# EAGLE board blmc_konze (EAGLE 4.15)
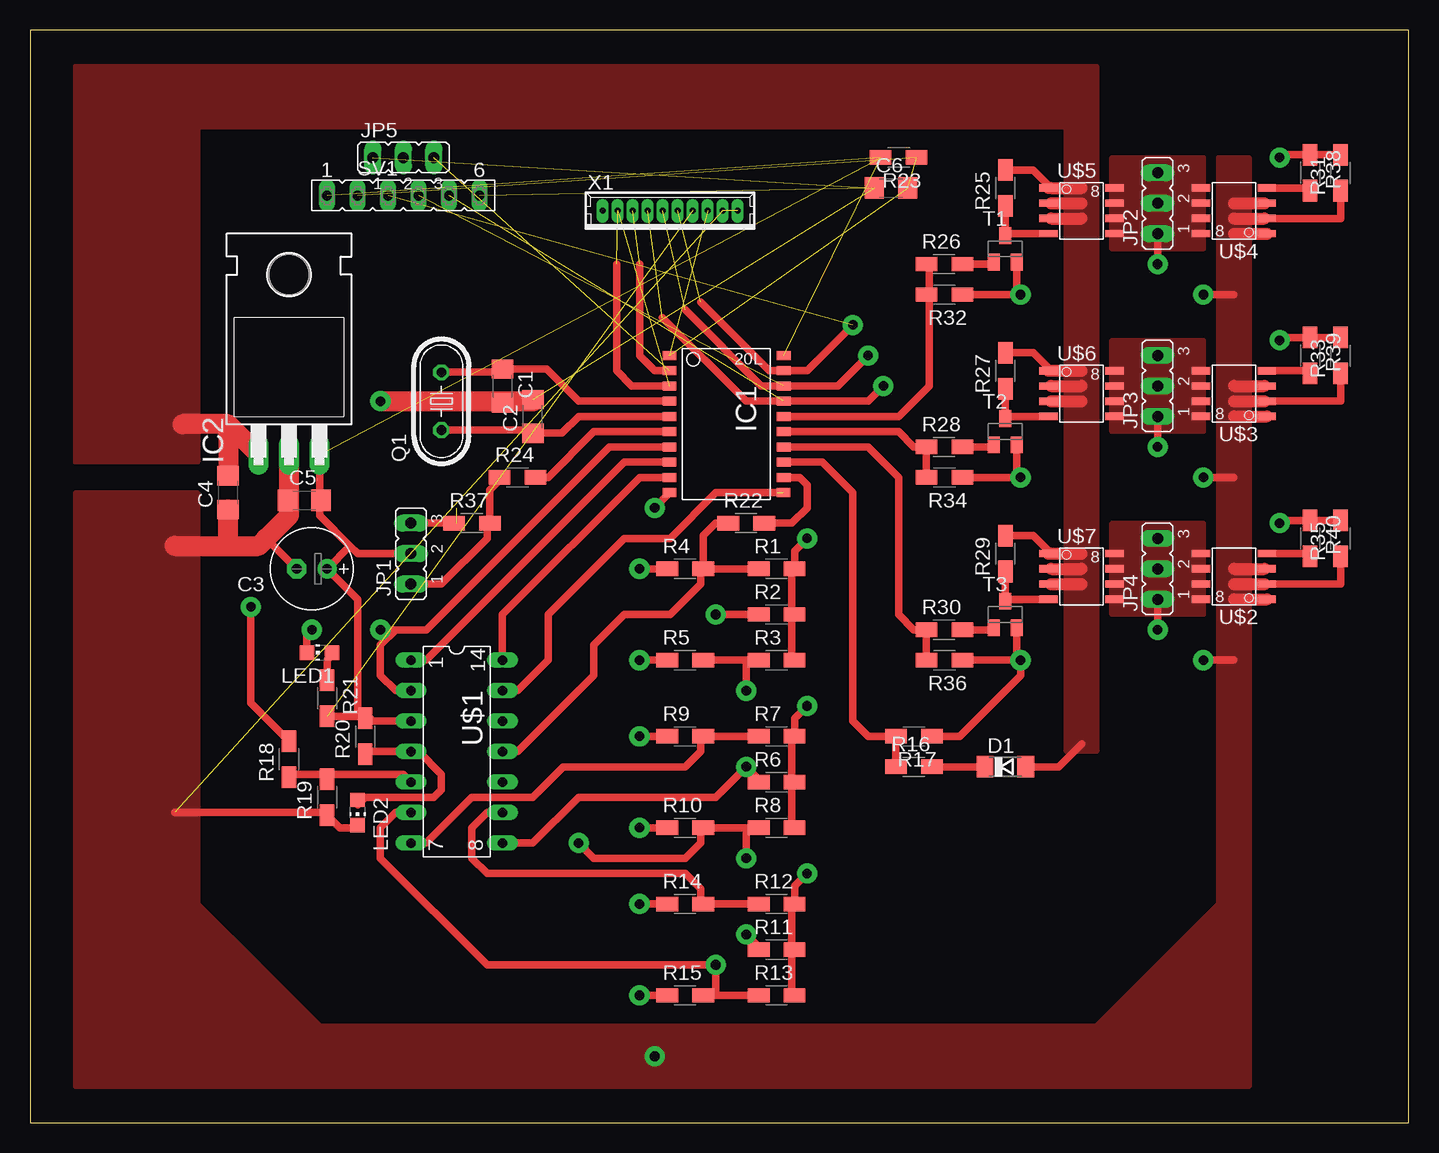
[diagram p0: board, top side]
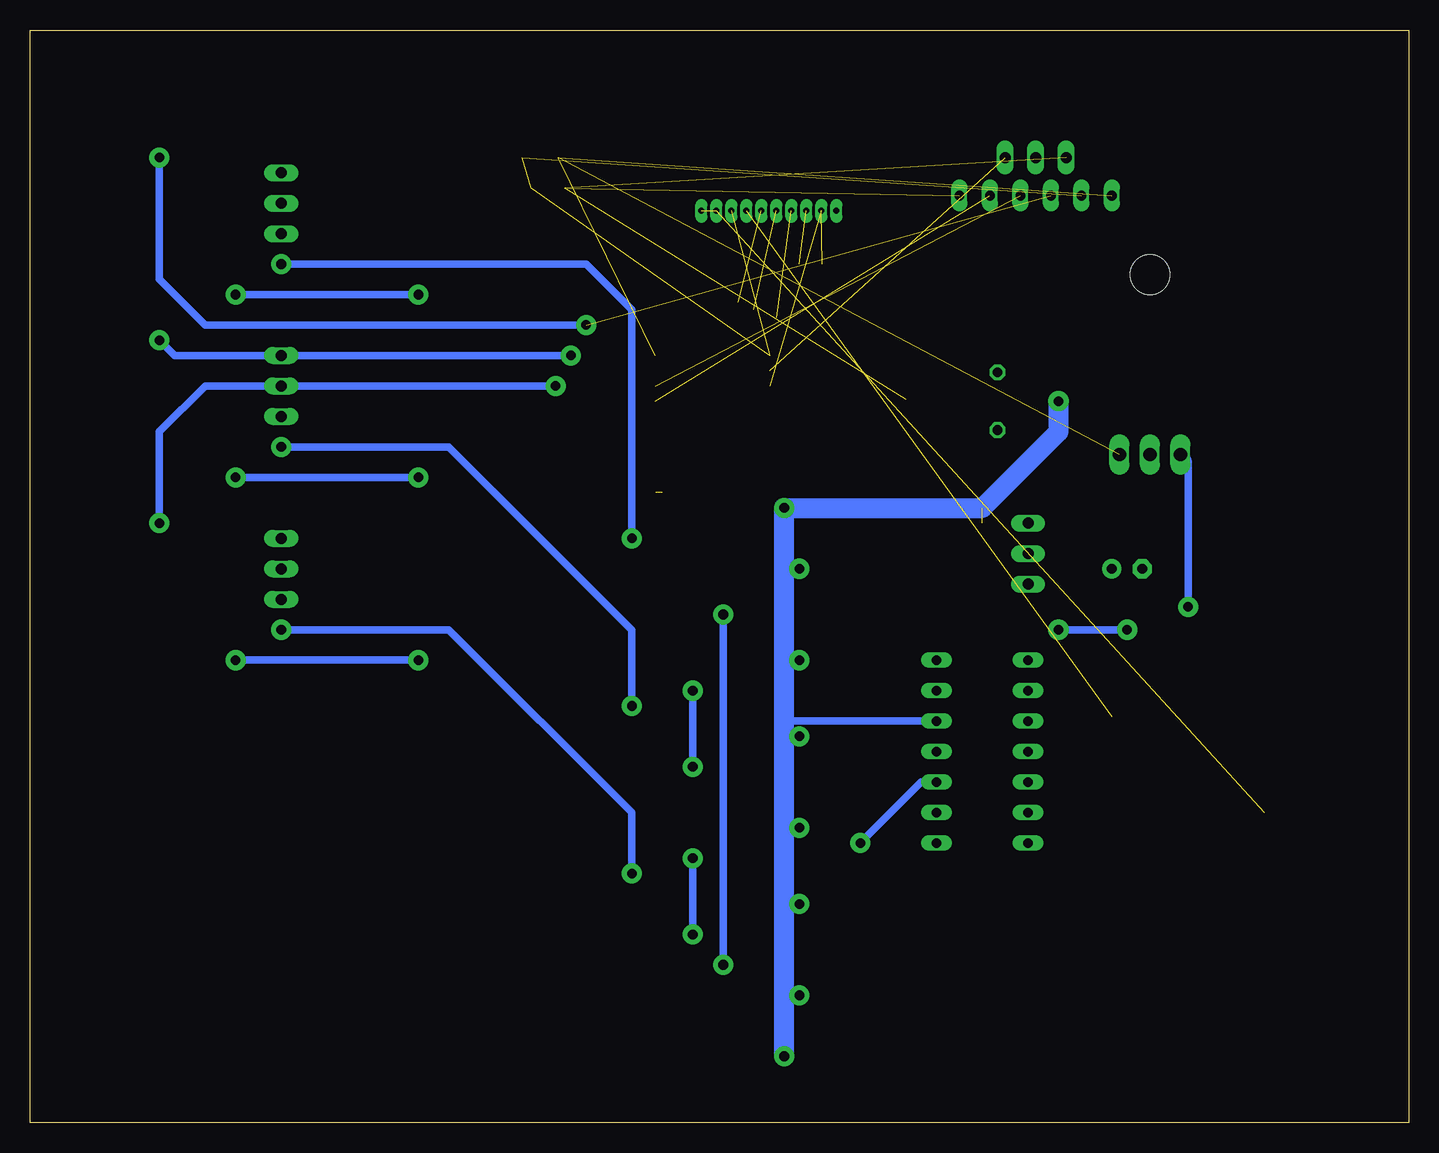
[diagram p1: board, bottom side, seen from below]

Size 114.92 x 91.11 mm. Coordinates in mm from the lower left corner, seen from the top.
Outline: 0,0 114.92,0 114.92,91.11 0,91.11 0,0
Copper layers (1*16): Top 0.035mm / dielectric 1.5mm / Bottom 0.035mm
Design rules "default": minimum track width 10mil, minimum drill 24mil, track to track 8mil, track to pad 8mil, pad to pad 8mil, via to via 8mil, smd to smd 8mil, copper to edge 40mil, drill to drill 8mil, minimum pad ring 10mil, minimum via ring 8mil, stop-mask expansion 4mil, vias tented up to drill 0mil, thermal gap 10mil

## Footprints (pad centres in the part's own frame; a part is rotated, then mirrored left to right if it is on the bottom)
C1206 = smd 1.6 x 1.8: 1 -1.4,0; 2 1.4,0
E2,5-7 = drill 0.813 pad 1.6 round: + -1.27,0 | drill 0.813 pad 1.6 octagon: - 1.27,0
SOD80C = smd 1.4 x 1.8: A 1.7,0; C -1.7,0
SO-20L = smd 0.762 x 1.143: 1 -5.08,-5.131; 2 -3.81,-5.131; 3 -2.54,-5.131; 4 -1.27,-5.131; 5 0,-5.131; 6 1.27,-5.131; 7 2.54,-5.131; 8 3.81,-5.131; 9 5.08,-5.131; 10 6.35,-5.131; 11 6.35,4.369; 12 5.08,4.394; 13 3.81,4.394; 14 2.54,4.394; 15 1.27,4.394; 16 0,4.394; 17 -1.27,4.394; 18 -2.54,4.394; 19 -3.81,4.394; 20 -5.08,4.394
TO220H = drill 1.118 long: 1 -2.54,-10.16; 2 0,-10.16; 3 2.54,-10.16 | hole 3.302: 0,4.826
JP2 = drill 0.914 long: 1 -2.54,0; 2 0,0; 3 2.54,0
CHIP-LED0805 = smd 1.2 x 1.2: A 0,-1.05; C 0,1.05
HC49U-V = drill 0.813 octagon: 1 -2.413,0; 2 2.413,0
R1206W = smd 1.8 x 1.2: 1 -1.499,0; 2 1.499,0
FE06 = drill 0.813 long: 1 -6.35,0; 2 -3.81,0; 3 -1.27,0; 4 1.27,0; 5 3.81,0; 6 6.35,0
SOT23 = smd 1 x 1.4: 1 -0.95,-1.1; 2 0.95,-1.1; 3 0,1.1
DIL-14 = drill 0.8 long: 1 -3.81,-3.81; 2 -1.27,-3.81; 3 1.27,-3.81; 4 3.81,-3.81; 5 6.35,-3.81; 6 8.89,-3.81; 7 11.43,-3.81; 8 11.43,3.81; 9 8.89,3.81; 10 6.35,3.81; 11 3.81,3.81; 12 1.27,3.81; 13 -1.27,3.81; 14 -3.81,3.81
SO-8 = smd 1.524 x 0.61: 1 -2.743,1.27; 2 -2.743,0; 3 -2.743,-1.27; 4 -2.743,-2.54; 5 2.743,-2.54; 6 2.743,-1.27; 7 2.743,0; 8 2.743,1.27
53047-10 = drill 0.5 pad 0.698 long: 1 5.625,0; 2 4.375,0; 3 3.125,0; 4 1.875,0; 5 0.625,0; 6 -0.625,0; 7 -1.875,0; 8 -3.125,0; 9 -4.375,0; 10 -5.625,0

## Placement (x,y rotation side)
C1  15pF  [C1206]  39.37,61.43 270 top
C2  15pF  [C1206]  41.9,58.89 90 top
C3  10µF  [E2,5-7]  23.49,46.19 180 top
C4  100nF  [C1206]  16.51,52.54 90 top
C5  100nF  [C1206]  22.85,51.91 0 top
C6  100nF  [C1206]  71.75,77.94 0 top
D1  [SOD80C]  81.28,29.68 0 top
IC1  AT90S2313S  [SO-20L]  58.41,58.89 270 top
IC2  7805T  [TO220H]  21.59,65.88 0 top
JP1  [JP2]  31.74,47.46 90 top
JP2  [JP2]  93.97,76.67 90 top
JP3  [JP2]  93.97,61.43 90 top
JP4  [JP2]  93.97,46.19 90 top
JP5  [JP2]  31.11,80.48 0 top
LED1  [CHIP-LED0805]  24.13,39.2 90 top
LED2  [CHIP-LED0805]  27.3,25.87 180 top
Q1  [HC49U-V]  34.29,60.16 90 top
R1  10k  [R1206W]  62.23,46.19 0 top
R2  20k  [R1206W]  62.23,42.38 0 top
R3  20k  [R1206W]  62.23,38.57 0 top
R4  2k2  [R1206W]  54.6,46.19 0 top
R5  2k2  [R1206W]  54.6,38.57 0 top
R6  20k  [R1206W]  62.23,28.41 0 top
R7  10k  [R1206W]  62.23,32.22 0 top
R8  20k  [R1206W]  62.23,24.6 0 top
R9  2k2  [R1206W]  54.6,32.22 0 top
R10  2k2  [R1206W]  54.6,24.6 0 top
R11  20k  [R1206W]  62.23,14.44 0 top
R12  10k  [R1206W]  62.23,18.25 0 top
R13  20k  [R1206W]  62.23,10.63 0 top
R14  2k2  [R1206W]  54.6,18.25 0 top
R15  2k2  [R1206W]  54.6,10.63 0 top
R16  20k  [R1206W]  73.66,29.68 0 top
R17  2k2  [R1206W]  73.66,32.22 180 top
R18  20k  [R1206W]  21.59,30.31 90 top
R19  10k  [R1206W]  24.76,27.14 90 top
R20  2k2  [R1206W]  27.93,32.22 90 top
R21  2k2  [R1206W]  24.76,35.39 270 top
R22  10k  [R1206W]  59.68,50 0 top
R23  10k  [R1206W]  72.38,80.48 180 top
R24  10k  [R1206W]  40.63,53.81 0 top
R25  680R  [R1206W]  81.28,77.94 90 top
R26  10k  [R1206W]  76.19,71.59 0 top
R27  680R  [R1206W]  81.28,62.7 90 top
R28  10k  [R1206W]  76.19,56.35 0 top
R29  680R  [R1206W]  81.28,47.46 90 top
R30  10k  [R1206W]  76.19,41.11 0 top
R31  47k  [R1206W]  109.22,79.21 90 top
R32  47k  [R1206W]  76.19,69.05 180 top
R33  47k  [R1206W]  109.22,63.97 90 top
R34  47k  [R1206W]  76.19,53.81 180 top
R35  47k  [R1206W]  109.22,48.73 90 top
R36  47k  [R1206W]  76.19,38.57 180 top
R37  47k  [R1206W]  36.82,50 0 top
R38  100R  [R1206W]  106.68,79.21 270 top
R39  100R  [R1206W]  106.68,63.97 270 top
R40  100R  [R1206W]  106.68,48.73 270 top
SV1  [FE06]  31.11,77.3 0 top
T1  BC847  [SOT23]  81.28,72.86 0 top
T2  BC847  [SOT23]  81.28,57.62 0 top
T3  BC847  [SOT23]  81.28,42.38 0 top
U$1  LM339D  [DIL-14]  35.55,34.76 270 top
U$2  SI4420N  [SO-8]  100.33,44.92 180 top
U$3  SI4420N  [SO-8]  100.33,60.16 180 top
U$4  SI4420N  [SO-8]  100.33,75.4 180 top
U$5  SI4425P  [SO-8]  87.62,76.67 0 top
U$6  SI4425P  [SO-8]  87.62,61.43 0 top
U$7  SI4425P  [SO-8]  87.62,46.19 0 top
X1  [53047-10]  53.34,76.03 0 top

## Library data of the parts
C1-C6 R1-R40 = rcl
D1 = diode
IC1 = atmel
IC2 = linear
JP1-JP5 = jumper
LED1 LED2 = led
Q1 = crystal
SV1 = con-lsta
T1-T3 = transistor-npn
U$1-U$7 = bko
X1 = con-molex

## Nets
+5V: C3.+ C5.2 IC1.20 IC2.3 JP1.2 R20.2 R21.2 R23.2 SV1.1 U$1.3 X1.4
+UB: C4.2 D1.A IC2.1 R18.2 R25.2 R27.2 R29.2 U$5.1 U$6.1 U$7.1
GND: C1.2 C2.2 C3.- C4.1 C5.1 C6.1 IC1.10 IC2.2 JP1.3 JP5.1 LED2.C R4.1 R5.1 R9.1 R10.1 R14.1 R15.1 R17.1 R19.1 R31.1 R32.1 R33.1 R34.1 R35.1 R36.1 R37.1 SV1.6 T1.2 T2.2 T3.2 U$1.12 U$2.1 U$3.1 U$4.1 X1.1 X1.2
MISO: IC1.18 R33.2 R39.1 SV1.4 X1.6
MOSI: IC1.17 R35.2 R40.1 SV1.5 X1.7
N$1: JP2.1 JP2.2 JP2.3 R1.2 R2.2 R3.2 U$4.5 U$4.6 U$4.7 U$4.8 U$5.5 U$5.6 U$5.7 U$5.8
N$2: R2.1 R13.1 R15.2 U$1.6
N$3: R1.1 R4.2 R22.1 U$1.11
N$4: JP3.1 JP3.2 JP3.3 R6.2 R7.2 R8.2 U$3.5 U$3.6 U$3.7 U$3.8 U$6.5 U$6.6 U$6.7 U$6.8
N$5: R38.2 U$4.4
N$7: IC1.16 R26.1 R32.2
N$8: R39.2 U$3.4
N$9: R40.2 U$2.4
N$10: R3.1 R5.2 R6.1 U$1.8
N$11: IC1.15 R28.1 R34.2
N$12: R7.1 R9.2 U$1.7
N$13: R8.1 R10.2 R11.1 U$1.10
N$14: IC1.14 R30.1 R36.2
N$15: R12.1 R14.2 U$1.9
N$16: IC1.8 U$1.1
N$17: IC1.7 LED1.C U$1.2
N$18: IC1.9 U$1.14
N$19: IC1.11 U$1.13
N$21: LED1.A R21.1
N$22: JP1.1 R24.1 R37.2
N$23: R18.1 R19.2 U$1.5
N$24: R27.1 T2.3 U$6.4
N$25: LED2.A R20.1 U$1.4
N$26: IC1.6 R24.2
N$27: C2.1 IC1.5 Q1.1
N$28: C1.1 IC1.4 Q1.2
N$29: D1.C R16.2
N$30: IC1.13 R16.1 R17.2
N$33: IC1.12 R22.2
N$34: R25.1 T1.3 U$5.4
N$39: R29.1 T3.3 U$7.4
N$43: JP4.1 JP4.2 JP4.3 R11.2 R12.2 R13.2 U$2.5 U$2.6 U$2.7 U$2.8 U$7.5 U$7.6 U$7.7 U$7.8
N$46: R30.2 T3.1
N$47: R28.2 T2.1
N$48: R26.2 T1.1
N$51: X1.10
RESET: C6.2 IC1.1 R23.1 SV1.2 X1.3
RXD: IC1.2 JP5.3 X1.8
SCK: IC1.19 R31.2 R38.1 SV1.3 X1.5
TXD: IC1.3 JP5.2 X1.9

## Tracks (layer width: path | path; a pad name or v marks a point on that pad's centre or on a via)
+5V  (4 unrouted)
  Top 0.61: 24.13,51.27 24.13,50.63 26.66,48.09 | 24.13,51.27 IC2.3 | 26.66,48.09 27.3,47.46 JP1.2 | C5.2 24.13,51.77 24.13,51.27 | 26.66,48.09 C3.+ 27.3,43.65 27.3,34.35 R20.2 | R20.2 27.93,34.12 28.57,33.49 U$1.3 | R20.2 27.93,33.49 27.53,33.9 R21.2
+UB  (via drill 0.8 pad 1.68)
  Top 0.61: R25.2 83.59,79.44 85.09,77.94 | U$6.1 85.09,62.7 83.59,64.2 R27.2 | R29.2 83.59,48.96 85.09,47.46 | D1.A 85.72,29.68 87.62,31.59 | R18.2 18.41,34.99 v18.41,43.02
  Top 1.016: U$5.1 85.09,77.94 87.62,77.94 | 85.09,76.67 87.62,76.67 | 85.09,75.4 87.62,75.4 | U$6.1 87.62,62.7 | 85.09,61.43 87.62,61.43 | 85.09,60.16 87.62,60.16 | U$7.1 85.09,47.46 87.62,47.46 | 85.09,46.19 87.62,46.19 | 85.09,44.92 87.62,44.92
  Top 1.676: 16.51,58.25 12.7,58.25 | IC2.1 16.51,58.25 | 16.51,58.25 C4.2
  Bottom 0.61: v18.41,43.02 18.41,55.08 arc-90 IC2.1
  pour Top (no thermals): 88.9,88.1 88.9,30.95 86.36,30.95 86.36,83.02 13.97,83.02 13.97,55.08 3.8,55.08 3.8,88.1
GND  (via drill 0.8 pad 1.68)  (6 unrouted)
  Top 0.61: R31.1 109.22,75.4 102.87,75.4 | R32.1 v82.54,69.05 82.22,69.37 T1.2 | v97.78,69.05 100.33,69.05 | R34.1 v82.54,53.81 82.22,54.13 T2.2 | v97.78,53.81 100.33,53.81 | v82.54,38.57 R36.1 | v97.78,38.57 100.33,38.57 | T3.2 82.22,38.89 v82.54,38.57 | R33.1 109.22,60.16 102.87,60.16 | R35.1 109.22,44.92 102.87,44.92 | IC1.10 53.28,52.49 v52.07,51.27 | v50.79,46.19 R4.1 | v50.79,38.57 R5.1 | v50.79,32.22 R9.1 | v50.79,24.6 R10.1 | v50.79,18.25 R14.1 | v50.79,10.63 R15.1 | 35.55,50 R37.1 JP1.3 | C5.1 21.45,51.4 21.59,51.27 | 19.68,48.73 C3.- | R17.1 77.47,32.22 82.54,37.3 v82.54,38.57 | LED2.C 27.3,24.6 25.8,24.6 R19.1 24.53,25.87 12.06,25.87
  Top 1.016: 100.33,74.13 U$4.1 | 100.33,75.4 102.87,75.4 | 100.33,76.67 102.87,76.67 | 100.33,58.89 U$3.1 | 100.33,60.16 102.87,60.16 | 100.33,61.43 102.87,61.43 | 100.33,43.65 U$2.1 | 100.33,44.92 102.87,44.92 | 100.33,46.19 102.87,46.19
  Top 1.676: v29.21,60.16 39.37,60.16 C1.2 39.49,60.16 41.9,60.16 C2.2 | IC2.2 21.59,51.27 21.59,50.63 19.68,48.73 19.05,48.09 16.51,48.09 | 12.06,48.09 16.51,48.09 | 16.51,48.09 C4.1
  Bottom 0.61: v82.54,69.05 v97.78,69.05 | v82.54,53.81 v97.78,53.81 | v82.54,38.57 v97.78,38.57 | 52.07,46.19 v50.79,46.19 | 52.07,38.57 v50.79,38.57 | 52.07,32.22 v50.79,32.22 | 52.07,24.6 v50.79,24.6 | 52.07,18.25 v50.79,18.25 | 52.07,10.63 v50.79,10.63 | 52.07,33.49 U$1.12
  Bottom 1.676: v52.07,5.55 52.07,10.63 52.07,18.25 52.07,24.6 52.07,32.22 52.07,33.49 52.07,38.57 52.07,46.19 v52.07,51.27 35.55,51.27 29.21,57.62 v29.21,60.16
  pour Top (no thermals): 99.06,80.48 101.59,80.48 101.59,3.01 3.8,3.01 3.8,52.54 13.97,52.54 13.97,18.25 24.13,8.09 88.9,8.09 99.06,18.25
MISO  (via drill 0.8 pad 1.68)  (2 unrouted)
  Top 0.61: R33.2 106.9,65.47 106.68,65.24 R39.1 104.36,65.47 v104.14,65.24 | v69.84,63.97 67.31,61.43 IC1.18 60.96,61.43 54.6,67.78
  Bottom 0.61: v104.14,65.24 102.87,63.97 v69.84,63.97
MOSI  (via drill 0.8 pad 1.68)  (2 unrouted)
  Top 0.61: R35.2 106.9,50.23 106.68,50 R40.1 104.36,50.23 v104.14,50 | v71.12,61.43 69.84,60.16 IC1.17 59.68,60.16 52.7,67.14
  Bottom 0.61: v71.12,61.43 100.33,61.43 104.14,57.62 v104.14,50
N$1  (via drill 0.8 pad 1.68)
  Top 0.61: 63.49,42.38 63.49,46.19 R1.2 63.72,47.69 v64.77,48.73 | R3.2 63.49,38.57 63.49,42.38 | 63.49,42.38 R2.2 | v93.97,71.59 JP2.1
  Bottom 0.61: v64.77,48.73 64.77,67.78 68.57,71.59 v93.97,71.59
  pour Top (no thermals): 90.17,80.48 97.78,80.48 97.78,72.86 90.17,72.86
N$2  (via drill 0.8 pad 1.68)
  Top 0.61: 55.88,10.63 R15.2 57.15,10.63 | 57.15,10.63 R13.1 | v57.15,42.38 R2.1 | 57.15,10.63 v57.15,13.17 38.1,13.17 29.21,22.06 29.21,24.6 30.48,25.87 U$1.6
  Bottom 0.61: v57.15,13.17 v57.15,42.38
N$3
  Top 0.61: 60.96,46.19 R1.1 R4.2 | U$1.11 40.63,30.95 46.99,37.3 46.99,39.84 49.52,42.38 53.34,42.38 55.88,44.92 55.88,46.19 R4.2 | R4.2 56.1,48.96 57.15,50 R22.1 58.41,50
N$4  (via drill 0.8 pad 1.68)
  Top 0.61: 63.49,28.41 63.49,32.22 R7.2 63.72,33.72 v64.77,34.76 | R8.2 63.49,24.6 63.49,28.41 | 63.49,28.41 R6.2 | v93.97,56.35 JP3.1
  Bottom 0.61: v64.77,34.76 64.77,41.11 80,56.35 v93.97,56.35
  pour Top (no thermals): 90.17,65.24 97.78,65.24 97.78,57.62 90.17,57.62
N$5
  Top 0.61: R38.2 106.68,77.94 U$4.4
N$7
  Top 0.61: R26.1 74.93,71.59 74.93,69.05 | IC1.16 72.38,58.89 74.93,61.43 74.93,69.05 | 74.93,69.05 R32.2
N$8
  Top 0.61: R39.2 106.68,62.7 U$3.4
N$9
  Top 0.61: R40.2 106.68,47.46 U$2.4
N$10  (via drill 0.8 pad 1.68)
  Top 0.61: 55.88,38.57 R5.2 59.68,38.57 | 59.68,38.57 R3.1 | R6.1 60.73,28.64 v59.68,29.68 57.15,27.14 45.71,27.14 41.9,23.33 U$1.8 | v59.68,36.03 59.68,38.57
  Bottom 0.61: v59.68,29.68 v59.68,36.03
N$11
  Top 0.61: R34.2 74.93,53.81 74.7,54.04 R28.1 | IC1.15 72.38,57.62 73.66,56.35 R28.1 | R28.1 74.93,56.35
N$12
  Top 0.61: 60.96,32.22 R7.1 R9.2 55.88,32.22 55.88,30.95 54.6,29.68 44.45,29.68 41.9,27.14 36.82,27.14 33.02,23.33 U$1.7
N$13  (via drill 0.8 pad 1.68)
  Top 0.61: 59.68,24.6 R10.2 55.88,24.6 55.88,23.33 54.6,22.06 46.99,22.06 v45.71,23.33 | 59.68,24.6 R8.1 | R11.1 60.73,14.67 v59.68,15.71 | 59.68,24.6 v59.68,22.06
  Bottom 0.61: v59.68,22.06 v59.68,15.71 | U$1.10 40.63,28.41 v45.71,23.33
N$14
  Top 0.61: R36.2 74.93,38.57 74.7,38.8 R30.1 | IC1.14 69.84,56.35 72.38,53.81 72.38,42.38 73.66,41.11 R30.1 | R30.1 74.93,41.11
N$15
  Top 0.61: 60.96,18.25 R12.1 R14.2 55.88,18.25 55.88,19.52 54.6,20.79 38.1,20.79 36.82,22.06 36.82,24.6 38.1,25.87 U$1.9
N$16
  Top 0.61: U$1.1 33.02,38.57 49.52,55.08 IC1.8 53.34,55.08
N$17  (via drill 0.8 pad 1.68)
  Top 0.61: U$1.2 30.48,36.03 29.21,37.3 29.21,39.84 30.48,41.11 | 30.48,41.11 33.02,41.11 48.26,56.35 IC1.7 53.34,56.35 | LED1.C 23.07,40.7 v23.49,41.11 | v29.21,41.11 30.48,41.11
  Bottom 0.61: v23.49,41.11 v29.21,41.11
N$18
  Top 0.61: U$1.14 39.37,42.38 50.79,53.81 IC1.9 53.34,53.81
N$19  (1 unrouted)
  Top 0.61: U$1.13 40.63,36.03 43.18,38.57 43.18,42.38 49.52,48.73 53.34,48.73 57.15,52.54 62.23,52.54
N$21
  Top 0.61: LED1.A 25.4,39.2 24.76,38.57 R21.1
N$22
  Top 0.61: JP1.1 34.29,44.92 38.1,48.73 38.1,50 R37.2 38.32,52.77 39.37,53.81 R24.1
N$23
  Top 0.61: U$1.5 31.11,29.05 24.76,29.05 | 24.76,29.05 R19.2 | R18.1 21.81,29.05 24.76,29.05
N$24
  Top 0.61: 81.28,58.89 R27.1 | T2.3 81.28,58.89 | 81.28,58.89 U$6.4
N$25
  Top 0.61: R20.1 28.16,30.95 U$1.4 32.38,30.95 34.29,29.05 34.29,27.77 33.65,27.14 27.93,27.14 27.3,26.5 LED2.A
N$26
  Top 0.61: R24.2 43.18,53.81 46.99,57.62 IC1.6 53.34,57.62
N$27
  Top 0.61: Q1.1 41.78,57.75 41.9,57.62 C2.1 44.32,57.49 45.71,58.89 IC1.5 53.34,58.89
N$28
  Top 0.61: Q1.2 39.24,62.57 39.37,62.7 C1.1 43.04,62.83 45.71,60.16 IC1.4 53.34,60.16
N$29
  Top 0.61: R16.2 D1.C
N$30
  Top 0.61: IC1.13 66.03,55.08 68.57,52.54 68.57,33.49 69.84,32.22 R17.2 72.38,32.22 72.16,31.99 R16.1
N$33
  Top 0.61: R22.2 63.49,50 64.77,51.27 64.77,53.17 64.13,53.81 IC1.12
N$34
  Top 0.61: 81.28,74.13 R25.1 | T1.3 81.28,74.13 | 81.28,74.13 U$5.4
N$39
  Top 0.61: 81.28,43.65 R29.1 | T3.3 81.28,43.65 | 81.28,43.65 U$7.4
N$43  (via drill 0.8 pad 1.68)
  Top 0.61: 63.49,14.44 63.49,18.25 R12.2 63.72,19.75 v64.77,20.79 | R13.2 63.49,10.63 63.49,14.44 | 63.49,14.44 R11.2 | v93.97,41.11 JP4.1
  Bottom 0.61: v64.77,20.79 64.77,25.87 80,41.11 v93.97,41.11
  pour Top (no thermals): 90.17,50 97.78,50 97.78,42.38 90.17,42.38
N$46
  Top 0.61: T3.1 80.18,41.28 80,41.11 R30.2
N$47
  Top 0.61: T2.1 80.18,56.52 80,56.35 R28.2
N$48
  Top 0.61: T1.1 80.18,71.76 80,71.59 R26.2
RESET  (4 unrouted)
RXD  (2 unrouted)
  Top 0.61: IC1.2 52.07,62.7 50.79,63.97 50.79,71.59
SCK  (via drill 0.8 pad 1.68)  (2 unrouted)
  Top 0.61: 109.22,80.48 R31.2 R38.1 104.36,80.71 v104.14,80.48 | v68.57,66.51 64.77,62.7 IC1.19 61.59,62.7 55.88,68.41
  Bottom 0.61: v104.14,80.48 104.14,70.32 100.33,66.51 v68.57,66.51
TXD  (2 unrouted)
  Top 0.61: IC1.3 50.16,61.43 48.89,62.7 48.89,71.59